# Altium PCB DSV1-002（电池保护板） REV0.2 20230331.PcbDoc (part 1 of 2)
Units mm, origin at the board's own origin, x right, y up, seen from the top; angles counter-clockwise.
Board outline 35.24 x 36.91 mm, 2 copper layers (TOP, BOTTOM), stack 0.264 mm thick; 97 components, 56 nets, 257 pads, 145 vias.
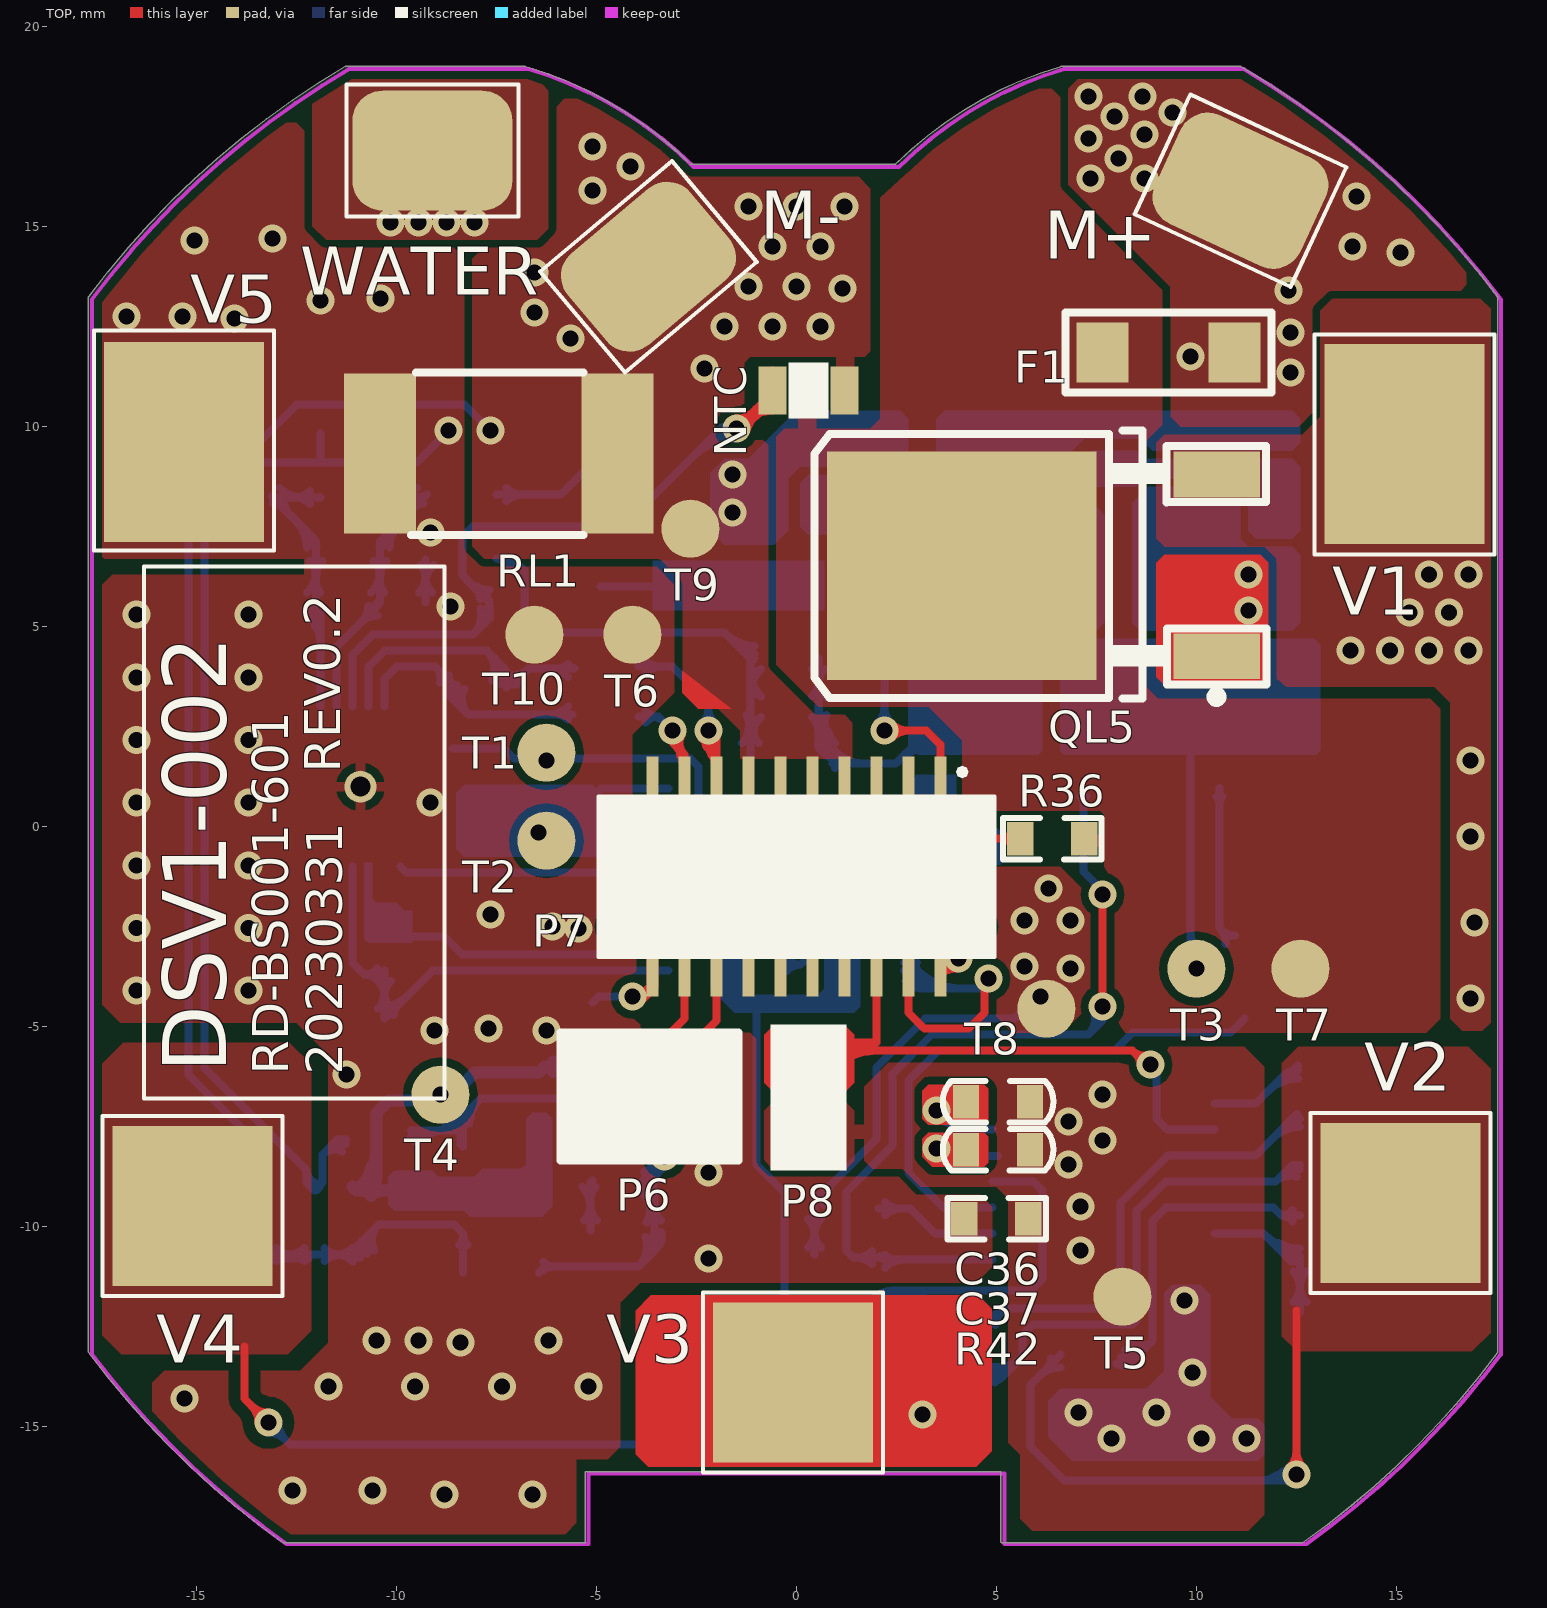
[diagram p0: TOP view]
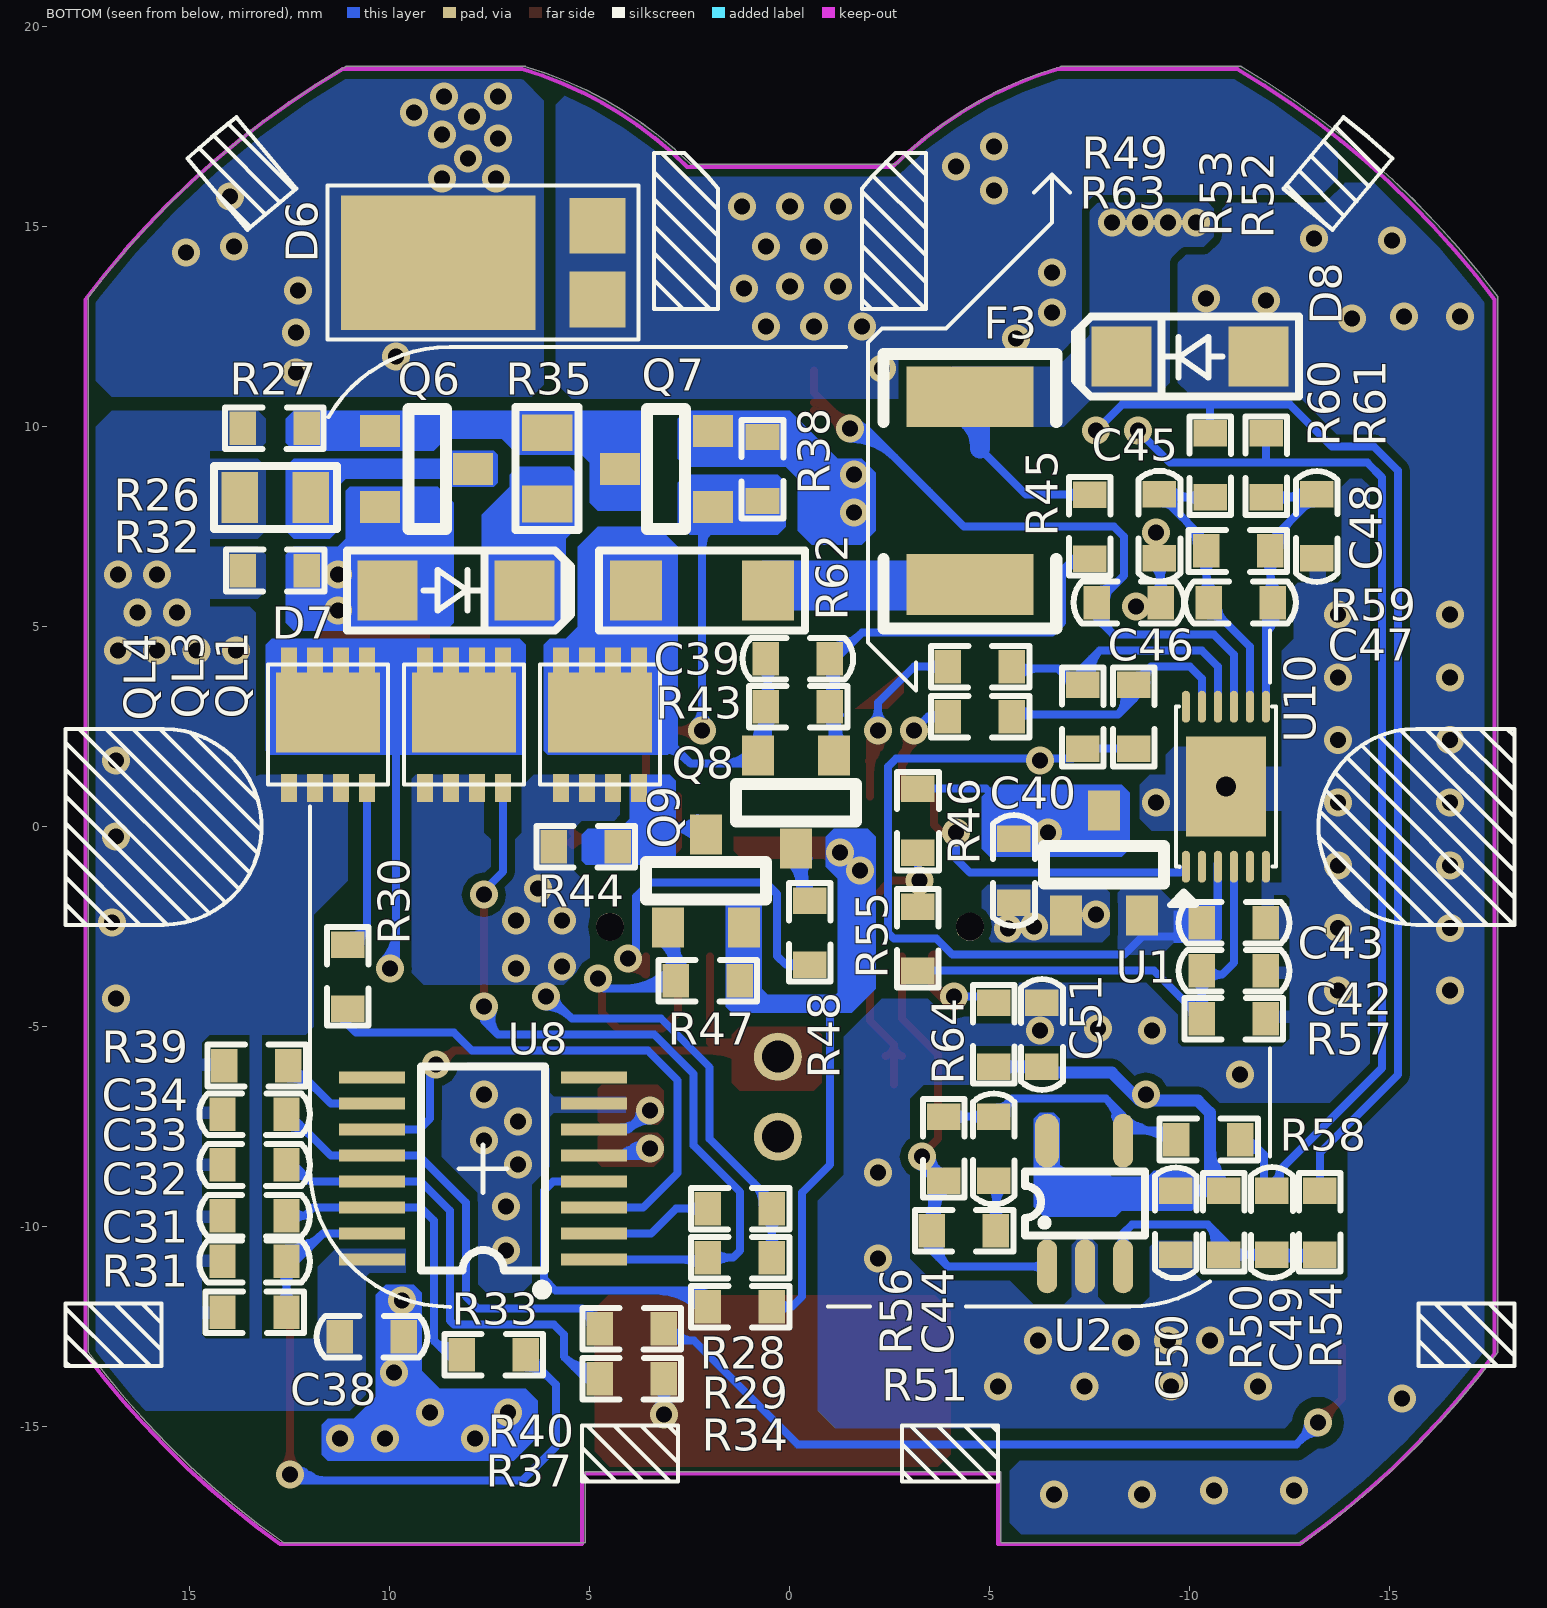
[diagram p1: BOTTOM view, seen from below]

## Layer stack, top to bottom
TOP: signal copper 0.0305
Dielectric: core 0.2032, FR-4, Dk 4.5
BOTTOM: signal copper 0.0305

## Board outline
-2.652,16.567 2.479,16.567 cw(c9.421,9.526) 6.606,19.004 6.613,19.007 11.103,19.007 11.113,19.002 cw(c-0.095,0.032) 17.53,13.254 17.536,13.244 17.536,-13.134 17.536,-13.136 17.533,-13.144 cw(c0.141,-0.186) 12.66,-17.897 12.651,-17.899 5.123,-17.899 5.11,-17.886 5.11,-16.129 -5.274,-16.129 -5.274,-17.886 -5.287,-17.899 -12.824,-17.899 -12.835,-17.897 cw(c-0.056,0.042) -17.697,-13.144 -17.7,-13.133 -17.7,13.244 -17.696,13.253 cw(c-0.133,0.124) -11.283,19.005 -11.276,19.007 -6.777,19.007 -6.771,19.005 cw(c-9.559,9.598)

## Design rules (kind name [scope] priority, off if disabled: settings)
Clearance 0.3 [InNet('V4')] p1: gap=0.3
Clearance [All] p2: gap=0.2
PlaneConnect [All] p1: planeconnectstyle=Relief reliefexpansion=0.508 reliefentries=4 reliefconductorwidth=0.254 reliefairgap=0.2
PolygonConnect [All] p1: connectstyle=Direct reliefconductorwidth=0.254 reliefentries=4 polygonreliefangle="90 Angle" airgapwidth=0.2
RoutingVias [All] p1: holewidth=0.4 width=0.7 viastyle="Through Hole" minholewidth=0.4 minwidth=0.7 maxholewidth=0.4 maxwidth=0.7
SolderMaskExpansion [All] p1: expansion=0.102
Width 0_3 [InNet('+5VSB')] p1: maxlimit=0.3 minlimit=0.3 preferedwidth=0.3
Width [All] p2: maxlimit=0.2 minlimit=0.2 preferedwidth=0.2
27 further rules are at their usual default settings.

## Components (designator, comment, footprint, x,y, rotation, side; value= is the part's Value field where it differs from the comment)
C31 "C_4_C0603_104" 0603C 13.385,-10.868 r0 bottom
C32 "C_4_C0603_104" 0603C 13.385,-9.725 r0 bottom
C33 "C_4_C0603_104" 0603C 13.385,-8.455 r0 bottom
C34 "C_4_C0603_104" 0603C 13.385,-7.185 r0 bottom
C36 "C_4_C0603_104" 0603C 5.039,-6.87 r180 top
C37 "C_4_C0603_104" 0603C 5.039,-8.07 r180 top
C38 "C_4_C0603_225" 0603C 10.45,-12.75 r0 bottom
C39 "C_4_C0603_104" 0603C -0.2,4.2 r180 bottom
C40 "CAP NP_C0603_0.1UF/50V" 0603C -5.6,-1.1 r270 bottom
C42 "C_4_C0603_1UF/50V" 0603C -11.1,-3.6 r0 bottom
C43 "C_4_C0603_1UF/50V" 0603C -11.1,-2.4 r0 bottom
C44 "C_4_C0603_104" 0603C -5.1,-8.05 r90 bottom
C45 "C_4_C0603_104" 0603C -9.237,7.509 r270 bottom
C46 "C_4_C0603_103" 0603C -8.475,5.604 r180 bottom
C47 "C_4_C0603_104" 0603C -11.269,5.604 r180 bottom
C48 "C_4_C0603_104" 0603C -13.174,7.509 r90 bottom
C49 "C_4_C0603_105" 0603C -12.05,-9.9 r270 bottom
C50 "C_4_C0603_104" 0603C -9.65,-9.9 r90 bottom
C51 "C_4_C0603_104" 0603C -6.3,-5.2 r270 bottom
D6 "SB2045" TO-277 6.8,14.1 r90 bottom (schematic designator D7)
D7 "ZHCS1000/SOT_6_SOD123_SS1060FL" SOD-123 8.345,5.904 r180 bottom
D8 "ZHCS1000/SOT_6_SOD123_SS1060FL" SOD-123 -10,11.75 r0 bottom
F1 "NTC_0603_10K/3380K" 1206R 9.3,11.85 r0 top
F3 "FUSE_1210_0.5R" 1812R -4.5,8.4 r90 bottom
M+ "HEADER 1_2_SMD_REC20M30_M+" SMD_REC20M30 11.1,15.9 r65 top
M- "HEADER 1_3_SMD_REC20M30_M-" SMD_REC20M30 -3.7,14 r130 top
NTC "NTC_0603_10K/3380K" 0603r#1 0.3,10.9 r180 top
P6 "Comment" HDR1X2#1 -4.7,-6.7 r0 top
P7 "HEADER 12_1_SGDBM_08_020P_V40_S" SGDBM_08_020P_V40 0,-1.25 r0 top locked
P8 "Comment" HDR1X2#2 2.6,-6.35 r180 top
Q6 "2N3904_1_SOT_23_MMBT2222A" SOT-23-ss#1 9.067,8.944 r270 bottom
Q7 "2N3904_0_SOT_23_MMBT2222A" SOT-23-ss#1 3.098,8.944 r90 bottom
Q8 "2N3906_1_SOT_23_MMBT2907A" SOT-23-ss#1 -0.15,0.6 r0 bottom
Q9 "2N3904_0_SOT_23_MMBT2222A" SOT-23-ss#1 2.1,-1.35 r180 bottom
QL1 "AP30P03DF  DFN8*8" "EDFN 3*3" 4.75,2.55 r180 bottom
QL3 "AP30P03DF  DFN8*8" "EDFN 3*3" 8.15,2.55 r180 bottom (schematic designator QL1)
QL4 "AP30P03DF  DFN8*8" "EDFN 3*3" 11.55,2.55 r180 bottom (schematic designator QL1)
QL5 "MOS-P" TO-252 4.2,6.5 r90 top (schematic designator QL1)
R26 "R_1_R0805_10R" 0805r 12.75,8.309 r0 bottom
R27 "R_1_R0603_5.1K" 0603R 12.877,9.96 r0 bottom
R28 "R_1_R0603_5.1K" 0603R 1.25,-9.55 r180 bottom
R29 "R_1_R0603_4.7M" 0603R 1.25,-10.775 r180 bottom
R30 "R_1_R0603_5.1K" 0603R 11.05,-3.75 r90 bottom
R31 "R_1_R0603_1K" 0603R 13.385,-12.138 r180 bottom
R32 "R_1_R0603_5.1K" 0603R 12.877,6.404 r180 bottom
R33 "R_1_R0603_1K" 0603R 7.4,-13.2 r0 bottom
R34 "R_1_R0603_1K" 0603R 1.25,-12 r180 bottom
R35 "R_1_R0805_10R" 0805r 6.146,9.071 r270 bottom
R36 "R_1_R0603_200K" 0603R 6.4,-0.3 r180 top
R37 "R_1_R0603_1K" 0603R 3.95,-13.8 r0 bottom
R38 "R_1_R0603_5.1K" 0603R 0.685,8.944 r270 bottom
R39 "R_1_R0603_1K" 0603R 13.339,-5.97 r180 bottom
R40 "R_1_R0603_1K" 0603R 3.95,-12.55 r0 bottom
R42 "R_1_R0603_51R" 0603R 5,-9.8 r0 top
R43 "R_1_R0805_10K" 0603r#2 -0.2,3 r180 bottom
R44 "R_1_R0603_5.1K" 0603R 5.1,-0.5 r0 bottom
R45 "R_1_R0603_10K" 0603R -7.5,7.5 r90 bottom
R46 "R_1_R0805_100R" 0603r#2 -3.2,0.15 r270 bottom
R47 "R_1_R0603_5.1K" 0603R 2.05,-3.85 r0 bottom
R48 "R_1_R0603_100K" 0603R -0.5,-2.65 r90 bottom
R49 "R_1_R0603_10K" 0603R -4.75,4 r180 bottom
R50 "R_1_R0603_5.1K" 0603R -10.85,-9.9 r90 bottom
R51 "R_1_R0603_10K" 0603R -4.35,-10.1 r180 bottom
R52 "R_1_R0603_5.1K" 0603R -8.597,2.753 r270 bottom
R53 "R_1_R0603_5.1K" 0603R -7.317,2.753 r270 bottom
R54 "R_1_R0603_5.1K" 0603R -13.25,-9.9 r90 bottom
R55 "R_1_R0603_4.7M" 0603R -3.2,-2.8 r90 bottom
R56 "R_1_R0603_100K" 0603R -3.85,-8.05 r90 bottom
R57 "R_1_R0603_1M" 0603R -11.1,-4.8 r0 bottom
R58 "R_1_R0603_5.1K" 0603R -10.461,-7.82 r180 bottom
R59 "R_1_R0603_100R" 0603R -11.209,6.894 r0 bottom
R60 "R_1_R0603_100R" 0603R -10.507,9.033 r270 bottom
R61 "R_1_R0603_100R" 0603R -11.904,9.033 r270 bottom
R62 "R_1_R1206_100MR 1%" 1206-r 2.2,5.9 r180 bottom
R63 "R_1_R0603_10K" 0603R -4.75,2.75 r180 bottom
R64 "R_1_R0603_100K" 0603R -5.1,-5.2 r90 bottom
RL1 "R_1_R2512_15MR 1%" 2512R -7.443,9.325 r90 top
T1 "" TP -6.25,1.85 r90 top (schematic designator TP1)
T2 "" TP -6.25,-0.35 r90 top (schematic designator TP1)
T3 "" TP 10,-3.55 r90 top (schematic designator TP1)
T4 "" TP -8.9,-6.7 r90 top (schematic designator TP1)
T5 "" TP 8.15,-11.75 r90 top (schematic designator TP1)
T6 "" TP -4.1,4.8 r90 top (schematic designator TP1)
T7 "" TP 12.6,-3.55 r90 top (schematic designator TP1)
T8 "" TP 6.25,-4.55 r90 top (schematic designator TP1)
T9 "" TP -2.65,7.45 r90 top (schematic designator TP1)
T10 "" TP -6.55,4.8 r90 top (schematic designator TP1)
U1 "P DGS_2_SOT_23_NCE3400" SOT-23-ss#2 -7.85,-0.95 r180 bottom
U2 "Comment" SOT-23-5 -7.38,-9.419 r180 bottom
U8 "LM3875/TO220_14_TSSOP16_P065_05" TSSOP16 7.67,-8.55 r0 bottom
U10 "LM3875/TO220_15_DFN12_4X3_0R5_C" DFN12_4X3_0R5 -10.9,1 r270 bottom
V1 "HEADER 1_2_S_45X45_B+" S_45X45#1 15.203,9.574 r0 top locked
V2 "HEADER 1_2_S_45X45_11.1V" S_45X45#2 15.1,-9.406 r0 top locked
V3 "HEADER 1_2_S_45X45_7.4V" S_45X45#2 -0.087,-13.896 r0 top locked
V4 "HEADER 1_2_S_45X45_3.7V" S_45X45#2 -15.1,-9.476 r0 top locked
V5 "HEADER 1_2_S_45X45_B-" S_45X45#1 -15.317,9.614 r0 top
WATER "HEADER 1_3_SMD_REC20M30_WATER" SMD_REC20M30 -9.1,16.9 r90 top

## Footprints (in the part's own frame and the unit in brackets; to place one, negate y for a bottom-side part, rotate by r counter-clockwise, add the part's x,y. Pads: shape width x height; smd on the part's side, far side on the other; paste and mask are expansions set on the pad)
0603C [mil]
  rect 26x33 smd mask+0: 1(31.5,0) 2(-31.5,0)
  silkscreen extent -55,-20 54,21
0603r#1 [mm]
  rect 0.7x1.2 smd mask+0: 1(0.9,0) 2(-0.9,0)
0603r#2 [mm]
  rect 0.66x0.838 smd mask+0: 1(0.8,0) 2(-0.8,0)
  silkscreen extent -1.22,-0.52 1.24,0.52
0603R [mil]
  rect 26x33 smd mask+0: 1(31.5,0) 2(-31.5,0)
  silkscreen extent -48,-20 49,21
0805r [mil]
  rect 36x50 smd mask+0: 1(39.5,3.17) 2(-30.5,3.17)
  silkscreen extent -56,-28 65,34
1206-r [mm]
  rect 1.3x1.5 smd: 1(1.65,0) 2(-1.65,0)
  silkscreen extent -2.57,-1 2.57,1
1206R [mm]
  rect 1.3x1.5 smd: 1(1.65,0) 2(-1.65,0)
  silkscreen extent -2.57,-1 2.57,1
1812R [mil]
  rect 60x125 smd: 1(-92.5,0) 2(92.5,0)
  silkscreen extent -135,-85 135,85
2512R [mm]
  rect 4x1.8 smd: 1(0,2.965) 2(0,-2.965)
  silkscreen extent -2.03,-2.12 2.03,2.2
DFN12_4X3_0R5 [mm] "DFN12_4X3_0R5"
  oval 0.8x0.2 smd: 1(2,-1) 2(2,-0.6) 3(2,-0.2) 4(2,0.2) 5(2,0.6) 6(2,1) 7(-2,1) 8(-2,0.6) 9(-2,0.2) 10(-2,-0.2) 11(-2,-0.6) 12(-2,-1)
  rect 2.5x2 smd: 13(0,0)
  silkscreen extent -2,-1.4 2.96,1.25
"EDFN 3*3" [mm]
  rect 0.4x0.7 smd: D(-0.975,1.576) D(-0.325,1.576) D(0.325,1.576) D(0.975,1.576) G(0.975,-1.576) S(-0.975,-1.576) S(-0.325,-1.576) S(0.325,-1.576)
  rect 2.6x2 smd: D(0,0.305)
  silkscreen extent -1.5,-1.5 1.5,1.5
HDR1X2#1 [mm] "Connector; Header; 2 Position"
  oval 1.5x2.2 smd: 1(-0.1,0) 2(2.1,0)
  silkscreen extent -1.2,-1.65 3.25,1.55
HDR1X2#2 [mm] "Connector; Header; 2 Position"
  oval 1.7x1.3 / inner round 1.2 / far side round 1.2 hole 0.8: 1(2.3,1.4) 2(2.3,-0.6)
S_45X45#1 [mm] "S_45X45"
  rect 4x5 smd: 1(0,0)
  silkscreen extent -2.25,-2.77 2.25,2.73
S_45X45#2 [mm] "S_45X45"
  rect 4x4 smd: 1(0,0)
  silkscreen extent -2.25,-2.25 2.25,2.25
SGDBM_08_020P_V40 [mm] "SGDBM_08_020P_V40"
  rect 0.3x2 smd: 1(3.6,2) 2(2.8,2) 3(2,2) 4(1.2,2) 5(0.4,2) 6(-0.4,2) 7(-1.2,2) 8(-2,2) 9(-2.8,2) 10(-3.6,2) 11(3.6,-2) 12(2.8,-2) 13(2,-2) 14(1.2,-2) 15(0.4,-2) 16(-0.4,-2) 17(-1.2,-2) 18(-2,-2) 19(-2.8,-2) 20(-3.6,-2)
  round 0.7 / inner round 1.524 / far side round 0.7 hole 0.7: " "(-4.5,-1.25) " "(4.499,-1.251)
  silkscreen extent -4.95,-2 4.95,2.77
SMD_REC20M30 [mm] "SMD_REC20M30"
  rrect50% 3x4 smd: 1(0,0)
  silkscreen extent -1.65,-2.15 1.65,2.15
SOD-123 [mm]
  rect 1.5x1.5 smd: 1(-1.715,0) 2(1.715,0)
  silkscreen extent -2.73,-1 2.89,1
SOT-23-5 [mm]
  oval 0.5x1.35 smd: 1(-0.95,-1.57) 2(0,-1.57) 3(0.95,-1.57) 4(0.95,1.57)
  oval 0.6x1.35 smd: 5(-0.95,1.57)
  silkscreen extent -1.5,-0.8 1.5,0.8
SOT-23-ss#1 [mm]
  rect 0.8x1 smd: 1(-0.95,-1.175) 2(0.95,-1.175) 3(0,1.15)
  silkscreen extent -1.5,-0.47 1.5,0.47
SOT-23-ss#2 [mm]
  rect 0.8x1 smd: 1(-0.95,-1.275) 2(0.95,-1.275) 3(0,1.35)
  silkscreen extent -1.5,-0.47 1.5,0.47
TO-252 [mil]
  rect 225x265 smd: D(0.79,2.76)
  rect 45x85 smd: G(-88.21,-248.24) S(90.79,-248.24)
  silkscreen extent -133,-297 134,148
TO-277 [mm]
  rect 1.39x1.4 smd: 1(-0.92,-1.991) 1(0.92,-1.991)
  rect 3.36x4.86 smd: 2(0,1.991)
  silkscreen extent -1.92,-3.01 1.93,4.77
TP [mm]
  round 1.45 smd mask+0: 1(0,0)
TSSOP16 [mm] "TSSOP16_P065_050X044"
  rect 1.65x0.3 smd: 1(-2.775,2.275) 2(-2.775,1.625) 3(-2.775,0.975) 4(-2.775,0.325) 5(-2.775,-0.325) 6(-2.775,-0.975) 7(-2.775,-1.625) 8(-2.775,-2.275) 9(2.775,-2.275) 10(2.775,-1.625) 11(2.775,-0.975) 12(2.775,-0.325) 13(2.775,0.325) 14(2.775,0.975) 15(2.775,1.625) 16(2.775,2.275)
  silkscreen extent -1.6,-2.55 1.55,3.15

## Part data
D6: library part "Diode 1N4448", "High Conductance Fast Diode"
QL1 QL3 QL4: library part 30H10K
T1 T2 T3 T4 T5 T6 T7 T8 T9 T10: library part TP

## Free pads (board coordinates)
  round 0.8 hole 0.5: 0(-10.9,1)
  round 1.524 all layers, no hole: 0(26.981,-11.637) 0(26.99,120.879) 0(137.644,-11.637) 0(137.653,120.879)

## Via types
v1: diameter 0.7, hole 0.4, TOP to BOTTOM, tented both sides, 145 vias

## Nets (pads, with @x,y where several pads share a name; then routed paths per layer and width w, separated by ;. In a path a pad name is that pad's centre, name@x,y a point inside that pad or via, vN(x,y) a via of type N, cw(c..) or ccw(c..) an arc to the next point about the centre after c; other vN are vias at no path point)
+3.3V: C43.1 R52.1 R53.1 T1.1 U1.2 U10.3 | length 22.4
  BOTTOM w0.2: U10.3@-10.7,-1 -10.7,-2 ; C43.1@-10.3,-2.4 -10.7,-2 ; R52.1@-8.597,1.953 R53.1@-7.317,1.953 -7.064,1.7 -2.65,1.7 -2.45,1.5 -2.45,-2.65 -2.6,-2.8 -3.666,-2.8 -4.066,-3.2 -8.35,-3.2 -8.8,-2.75 -9.597,-2.75 ; -10.7,-2 ccw(c-10.454,-1.754) -10.361,-2.089 cw(c-10.454,-1.754) -10.7,-2 ; -9.597,-2.75 cw(c-9.597,-1.786) -10.279,-2.468 ccw(c-9.597,-1.786) -9.597,-2.75 ; C43.1@-10.63,-2.07 cw(c-10.871,-2.311) -10.53,-2.311 ccw(c-10.871,-2.311) C43.1@-10.63,-2.07
  other v1: -6.25,1.65
+5VSB: C50.1 C51.1 R50.1 R64.2 T4.1 U2.5 | length 25.8
  BOTTOM w0.3: R50.1@-11.1,-9 -11,-9.1 -6.7,-9.1 -6.43,-8.83 U2.5@-6.43,-7.999 ; R50.1@-10.725,-8.925 -10.5,-8.7 ; R50.1@-10.603,-9.014 cw(c-10.109,-8.746) -10.595,-8.465 ; C50.1@-9.83,-8.97 C50.1@-9.761,-8.97 ; R64.2@-5.1,-6 C51.1@-6.3,-6 -6.45,-6.15 -8.05,-6.15 -8.75,-6.85 -10.2,-6.85 -10.5,-7.15 -10.5,-8.7 ; -10.5,-8.7 ccw(c-10.252,-8.949) -10.588,-9.049 cw(c-10.252,-8.949) -10.5,-8.7 ; -10.326,-9.1 cw(c-10.326,-8.665) -10.634,-8.973 ccw(c-10.326,-8.665) -10.326,-9.1 ; -10.326,-9.1 ccw(c-10.326,-9.535) -10.634,-9.227 cw(c-10.326,-9.535) -10.326,-9.1 ; -10.174,-9.1 cw(c-10.174,-9.535) -9.866,-9.227 ccw(c-10.174,-9.535) -10.174,-9.1 ; -10.174,-9.1 ccw(c-10.174,-8.665) -9.866,-8.973 cw(c-10.174,-8.665) -10.174,-9.1 ; -9.126,-9.1 cw(c-9.126,-8.665) -9.434,-8.973 ccw(c-9.126,-8.665) -9.126,-9.1 ; -9.126,-9.1 ccw(c-9.126,-9.535) -9.434,-9.227 cw(c-9.126,-9.535) -9.126,-9.1 ; -6.43,-8.586 cw(c-6.068,-8.586) -6.324,-8.33 ccw(c-6.068,-8.586) -6.43,-8.586 ; -6.43,-8.586 ccw(c-6.793,-8.586) -6.536,-8.33 cw(c-6.793,-8.586) -6.43,-8.586 ; -5.776,-6 cw(c-5.776,-5.565) -6.084,-5.873 ccw(c-5.776,-5.565) -5.776,-6 ; -5.776,-6 ccw(c-5.776,-6.435) -6.084,-6.127 cw(c-5.776,-6.435) -5.776,-6 ; -5.624,-6 cw(c-5.624,-6.435) -5.316,-6.127 ccw(c-5.624,-6.435) -5.624,-6 ; -5.624,-6 ccw(c-5.624,-5.565) -5.316,-5.873 cw(c-5.624,-5.565) -5.624,-6 ; R50.1@-10.889,-8.973 ccw(c-11.826,-8.035) -10.5,-8.035 cw(c-11.826,-8.035) R50.1@-10.889,-8.973 ; R50.1@-10.676,-9.185 ccw(c-11.102,-8.759) -10.5,-8.759 cw(c-11.102,-8.759) R50.1@-10.676,-9.185
  other v1: -8.9,-6.7
+5VSB_: P7.20 R64.1 | length 2.3
  TOP w0.3: v1@-3.925,-4.325 -3.6,-4 P7.20@-3.6,-3.25
  BOTTOM w0.2: R64.1@-5.1,-4.4 -4.95,-4.25 v1(-4.1,-4.25)
B+: C31.1 C32.1 C33.1 C34.1 C38.1 QL4.S QL5.S R26.1 R27.1 R31.2 R32.2 R39.2 U8.16 V1.1
  other v1: 16.85,-4.3 16.95,-2.4 16.85,-0.25 16.85,1.65 13.85,4.4 14.833,4.4 15.817,4.4 16.8,4.4 15.325,5.35 16.308,5.35 15.817,6.3 16.8,6.3
B-: C40.1 C42.2 C43.2 C45.1 C46.1 C48.2 C49.2 C50.2 C51.2 D8.1 P6.1 pad.0@-10.9,1 R42.2 R57.2 R58.1 R61.2 RL1.1 T6.1 T10.1 U1.1 U2.2 U10.6 U10.13 V5.1 | length 36.1
  BOTTOM w0.2: -11.904,9.104 -11.9,9.1 -9.5,9.1 v1(-8.7,9.9) ; R61.2@-11.904,9.833 -11.904,9.1 -14.434,9.1 -14.8,8.734 -14.8,-6.034 -12.25,-8.584 ; R58.1@-11.261,-7.82 -11.47,-7.82 -11.85,-8.2 ; C46.1@-9.275,5.604 C45.1@-9.275,6.5 ; C45.1@-9.275,6.625 C45.1@-9.275,6.5 ; C45.1@-9.275,6.675 C45.1@-9.275,6.5 ; -12.25,-8.584 ccw(c-11.92,-8.584) -12.049,-8.888 cw(c-11.92,-8.584) -12.25,-8.584 ; -12.25,-8.584 -12.25,-8.9 C49.2@-12.05,-9.1 -11.85,-8.9 -11.85,-8.2 ; -11.85,-8.2 cw(c-11.546,-8.504) -11.361,-8.116 ccw(c-11.546,-8.504) -11.85,-8.2 ; -9.275,6.249 cw(c-9.831,6.249) -9.438,5.856 ccw(c-9.831,6.249) -9.275,6.249 ; -9.275,6.249 ccw(c-8.719,6.249) -9.112,5.856 cw(c-8.719,6.249) -9.275,6.249 ; C49.2@-11.982,-9.079 ccw(c-12.302,-8.759) -11.85,-8.759 cw(c-12.302,-8.759) C49.2@-11.982,-9.079 ; -11.65,-8 cw(c-11.417,-8.234) -11.274,-7.936 ccw(c-11.417,-8.234) -11.65,-8 ; C45.1@-9.4,6.546 cw(c-9.701,6.245) -9.275,6.245 ccw(c-9.701,6.245) C45.1@-9.4,6.546 ; -9.275,6.062 cw(c-8.59,6.062) -9.074,6.546 ccw(c-8.59,6.062) -9.275,6.062
  other v1: -8.8,-16.7 -6.6,-16.7 -12.6,-16.6 -10.6,-16.6 -15.3,-14.3 -11.7,-14 -9.533,-14 -7.367,-14 -5.2,-14 -8.4,-12.9 -10.5,-12.85 -9.45,-12.85 -6.2,-12.85 -2.2,-10.8 -2.2,-8.65 -11.25,-6.2 -9.05,-5.1 -6.25,-5.1 -7.7,-5.05 -16.5,-4.1 -13.7,-4.1 -5.45,-2.55 -16.5,-2.533 -13.7,-2.533 -6.1,-2.5 -7.65,-2.2 -16.5,-0.967 -13.7,-0.967 -16.5,0.6 -13.7,0.6 -9.15,0.6 -16.5,2.167 -13.7,2.167 -16.5,3.733 -13.7,3.733 -16.5,5.3 -13.7,5.3 -8.65,5.5 -9.15,7.35 -14.05,12.7 -16.75,12.75 -15.35,12.75 -11.9,13.15 -10.4,13.2 -15.05,14.65 -13.1,14.7
BAT+: QL3.D QL4.D T3.1 | length 7.6
  BOTTOM w0.2: v1@9.85,-3.6 9.85,2.6 ; 9.85,-3.067 ccw(c10.483,-3.067) v1@10.035,-3.515 ; 9.85,-2.584 ccw(c10.966,-2.584) v1@10.177,-3.373
  other v1: 10,-3.55
BAT_GND: D6.1 M-.1 NTC.2 P7.4 P7.5 P7.6 P7.7 Q7.2 Q9.2 R34.1 R38.2 R47.2 R54.1 R60.2 RL1.2 T9.1 | length 59.5
  BOTTOM w0.2: R54.1@-13.25,-9.1 -13.25,-8.15 -15.2,-6.2 -15.2,8.9 -14.6,9.5 -13.55,9.5 -12.5,10.55 -10.45,10.55 ; R60.2@-10.507,9.833 -10.507,10.493 -10.45,10.55 ; v1(-7.65,9.9) -8.3,10.55 -10.45,10.55 ; -0.8,-4.4 -1,-4.6 -1,-8.45 -0.3,-9.15 -0.3,-11.75 -0.05,-12 ; -0.6,8.3 -0.6,9.1 ; -0.018,9.617 ccw(c-0.12,10.265) R38.2@0.41,9.879 ; 0.029,9.429 ccw(c-0.101,10.251) R38.2@0.572,9.762 ; 0.121,9.639 cw(c0.193,9.189) R38.2@0.461,9.558 ; R34.1@0.275,-12.15 ccw(c-0.05,-12.428) -0.05,-12 ; R34.1@0.275,-11.85 cw(c-0.05,-11.572) -0.05,-12 ; R34.1@0.45,-12 -0.05,-12 ; R38.2@0.799,9.761 ccw(c0.999,9.895) 1.119,9.686 ; R38.2@0.889,9.943 ccw(c1.063,10.245) 1.153,9.909 ; R38.2@0.965,9.872 ccw(c1.177,10.014) 1.304,9.793 ; R38.2@0.973,9.629 cw(c1.634,9.247) Q7.2@1.437,9.985 ; R47.2@1.112,-4.123 cw(c0.903,-4.4) 1.25,-4.4 ; R47.2@1.25,-3.65 1.25,-4.4 ; R47.2@1.388,-4.123 ccw(c1.597,-4.4) 1.25,-4.4 ; Q7.2@1.923,9.894 0.194,9.894 ; -0.6,9.1 cw(c0.421,8.079) 0.572,9.515 ccw(c0.421,8.079) -0.6,9.1 ; -0.6,9.1 0.194,9.894 ; 0.194,9.894 cw(c0.194,9.721) 0.366,9.731 ccw(c0.194,9.721) 0.194,9.894 ; R38.2@1.099,9.894 cw(c1.099,9.17) 1.611,9.682 ccw(c1.099,9.17) R38.2@1.099,9.894 ; R38.2@1.099,9.894 ccw(c1.099,10.618) 1.611,10.106 cw(c1.099,10.618) R38.2@1.099,9.894 ; 1.215,9.766 cw(c1.33,9.338) Q7.2@1.624,9.67 ; 1.215,9.766 ccw(c1.071,10.304) Q7.2@1.56,10.038 ; 1.215,9.766 cw(c1.33,9.338) Q7.2@1.624,9.67 ; 1.215,9.766 ccw(c1.071,10.304) Q7.2@1.56,10.038 ; 1.215,9.766 cw(c1.33,9.338) Q7.2@1.624,9.67 ; 1.215,9.766 ccw(c1.071,10.304) Q7.2@1.56,10.038 ; -0.303,9.397 cw(c0.477,8.616) 0.593,9.714 ccw(c0.477,8.616) -0.303,9.397 ; -0.007,9.693 cw(c0.534,9.152) 0.614,9.913 ccw(c0.534,9.152) -0.007,9.693 ; R38.2@0.795,9.723 cw(c1.209,9.309) 1.209,9.894 ccw(c1.209,9.309) R38.2@0.795,9.723 ; R38.2@0.937,9.581 cw(c1.692,8.826) 1.692,9.894 ccw(c1.692,8.826) R38.2@0.937,9.581
  other v1: -1.75,-1.1 -1.25,-0.65 -1.6,7.85 -1.6,8.8 -2.3,11.45 -5.65,12.2 -1.8,12.5 -0.6,12.5 0.6,12.5 -6.55,12.85 1.15,13.45 -1.2,13.5 0,13.5 -6.55,13.85 -0.6,14.5 0.6,14.5 -1.2,15.5 0,15.5 1.2,15.5 -5.1,15.9 -4.15,16.5 -5.1,17
CH+: P7.14 P7.15 P7.16 P7.17 QL1.S QL3.S R28.1 R29.1 R44.1 R46.1 R55.1 T8.1 | length 16.2
  TOP w0.2: v1(-3.244,-1.344) -2.53,-1.344 -2.124,-1.75 -1.376,-1.75
  BOTTOM w0.2: v1@-3.2,-1.344 R46.1@-3.2,-0.65 ; R29.1@0.287,-10.523 ccw(c-0.106,-10.13) 0.45,-10.13 ccw(c1.006,-10.13) R29.1@0.613,-10.523 ; R28.1@0.287,-9.802 cw(c-0.106,-10.195) 0.45,-10.195 cw(c1.006,-10.195) R28.1@0.613,-9.802 ; R29.1@0.45,-10.7 0.45,-9.361 2.004,-7.806 2.004,-6.014 3.219,-4.8 5.45,-4.8 v1@5.9,-4.35 ; R28.1@0.45,-9.231 ccw(c0.45,-8.917) R28.1@0.672,-9.139 ; R28.1@0.68,-9.461 cw(c1.478,-9.461) 0.914,-8.897 ; 5.503,-4.747 cw(c6.1,-5.345) v1@6.1,-4.5 ; 5.744,-4.506 ccw(c5.488,-4.25) v1@5.85,-4.25
  other v1: 6.1,-4.25 6.85,-3.55 5.7,-3.5 5.7,-2.35 6.85,-2.35 6.3,-1.55
CSN: C45.2 C47.2 R59.1 R60.1 U10.8 | length 22.2
  BOTTOM w0.2: U10.8@-11.5,3 -11.5,4.5 -10.409,5.591 R59.1@-10.409,6.894 -10.409,7.137 C45.2@-9.237,8.309 -9.313,8.233 R60.1@-10.507,8.233 ; -10.896,5.105 ccw(c-11.238,5.522) C47.2@-10.699,5.517 ; C47.2@-10.784,5.197 cw(c-10.531,4.889) C47.2@-10.492,5.286 ; C47.2@-10.599,5.474 C47.2@-10.469,5.604 ; R59.1@-10.421,7.011 ccw(c-10.663,7.585) -10.061,7.424 ; -9.663,7.912 cw(c-9.146,7.773) C45.2@-9.316,8.28 ; -10.409,6.249 cw(c-9.853,6.249) -10.246,6.642 ccw(c-9.853,6.249) -10.409,6.249 ; -10.409,6.249 ccw(c-10.965,6.249) -10.572,6.642 cw(c-10.965,6.249) -10.409,6.249 ; -9.862,8.233 cw(c-9.862,8.789) -10.255,8.396 ccw(c-9.862,8.789) -9.862,8.233 ; -9.862,8.233 ccw(c-9.862,7.677) -10.255,8.07 cw(c-9.862,7.677) -9.862,8.233 ; -10.889,5.111 cw(c-10.469,4.691) -10.469,5.285 ccw(c-10.469,4.691) -10.889,5.111 ; -10.851,5.149 ccw(c-11.217,5.515) -10.699,5.515 cw(c-11.217,5.515) -10.851,5.149 ; C47.2@-10.632,5.856 ccw(c-11.17,6.394) -10.409,6.394 cw(c-11.17,6.394) C47.2@-10.632,5.856 ; -10.409,6.104 ccw(c-10.058,6.104) -10.306,5.856 cw(c-10.058,6.104) -10.409,6.104 ; R59.1@-10.379,6.983 cw(c-9.934,6.983) -10.248,7.298 ccw(c-9.934,6.983) R59.1@-10.379,6.983 ; R59.1@-10.179,6.983 cw(c-9.251,6.983) -9.907,7.639 ccw(c-9.251,6.983) R59.1@-10.179,6.983 ; -10.065,8.233 ccw(c-10.065,9.048) -9.489,8.472 cw(c-10.065,9.048) -10.065,8.233 ; -9.782,7.764 ccw(c-10.326,8.309) -9.556,8.309 cw(c-10.326,8.309) -9.782,7.764 ; -9.698,8.233 cw(c-9.698,7.937) -9.489,8.146 ccw(c-9.698,7.937) -9.698,8.233 ; C45.2@-9.567,7.979 cw(c-9.326,7.738) -9.326,8.079 ccw(c-9.326,7.738) C45.2@-9.567,7.979
CSP: C47.1 C48.1 R59.2 R61.1 U10.7 | length 22.6
  BOTTOM w0.2: C48.1@-13.095,8.28 cw(c-13.265,7.773) -12.748,7.912 ; -12.359,7.429 ccw(c-11.747,7.593) R59.2@-11.997,7.011 ; -12.117,5.154 cw(c-11.891,5.284) C47.1@-12.051,5.491 ; C47.1@-12.069,5.604 -11.9,5.435 U10.7@-11.9,3 ; C47.1@-12.009,5.604 R59.2@-12.009,6.894 -12.009,7.144 -13.098,8.233 R61.1@-11.904,8.233 ; -12.003,4.956 cw(c-11.75,5.102) C47.1@-11.928,5.333 ; -12.549,8.233 cw(c-12.549,7.677) -12.156,8.07 ccw(c-12.549,7.677) -12.549,8.233 ; -12.549,8.233 ccw(c-12.549,8.789) -12.156,8.396 cw(c-12.549,8.789) -12.549,8.233 ; -12.009,6.249 cw(c-11.453,6.249) -11.846,6.642 ccw(c-11.453,6.249) -12.009,6.249 ; -12.009,6.249 ccw(c-12.565,6.249) -12.172,6.642 cw(c-12.565,6.249) -12.009,6.249 ; C48.1@-13.085,8.079 cw(c-13.085,7.738) -12.844,7.979 ccw(c-13.085,7.738) C48.1@-13.085,8.079 ; C48.1@-12.922,8.146 cw(c-12.713,7.937) -12.713,8.233 ccw(c-12.713,7.937) C48.1@-12.922,8.146 ; C48.1@-12.922,8.472 ccw(c-12.346,9.048) -12.346,8.233 cw(c-12.346,9.048) C48.1@-12.922,8.472 ; C48.1@-12.855,8.309 ccw(c-12.085,8.309) -12.629,7.764 cw(c-12.085,8.309) C48.1@-12.855,8.309 ; -12.516,7.651 cw(c-13.184,6.983) -12.239,6.983 ccw(c-13.184,6.983) -12.516,7.651 ; C47.1@-12.232,5.352 cw(c-13.033,4.551) -11.9,4.551 ccw(c-13.033,4.551) C47.1@-12.232,5.352 ; C47.1@-12.232,5.856 ccw(c-12.77,6.394) -12.009,6.394 cw(c-12.77,6.394) C47.1@-12.232,5.856 ; R59.2@-12.174,7.309 cw(c-12.501,6.983) -12.039,6.983 ccw(c-12.501,6.983) R59.2@-12.174,7.309 ; C47.1@-12.09,5.494 cw(c-12.55,5.034) -11.9,5.034 ccw(c-12.55,5.034) C47.1@-12.09,5.494 ; -12.009,6.104 ccw(c-11.658,6.104) -11.906,5.856 cw(c-11.658,6.104) -12.009,6.104
CTL: P7.13 P8.2 U8.11 | length 19.3
  TOP w0.2: P8.2@0.45,-5.6 8.4,-5.6 ; P8.2@0.521,-5.821 cw(c1.054,-6.354) P8.2@1.054,-5.6 ; P8.2@0.662,-5.962 cw(c1.536,-6.836) 1.536,-5.6 ; P8.2@0.804,-6.104 cw(c2.019,-7.319) 2.019,-5.6 ; P8.2@0.804,-5.396 ccw(c1.295,-4.905) 1.295,-5.6 ; 1.15,-5.4 2,-5.4 P7.13@2,-3.25 ; v1@8.8,-6 8.4,-5.6 ; 8.4,-5.6 ccw(c8.689,-5.311) 8.789,-5.708 cw(c8.689,-5.311) 8.4,-5.6 ; 8.494,-5.694 cw(c8.238,-5.95) 8.6,-5.95 ccw(c8.238,-5.95) 8.494,-5.694
  BOTTOM w0.2: v1@8.8,-6 9,-6.2 9,-7.3 9.275,-7.575 U8.11@10.445,-7.575
  other v1: 8.85,-5.95
"EN WATER": P7.12 Q9.1 R47.1 | length 19.5
  TOP w0.2: P7.12@2.8,-3.25 2.8,-4.65 3.2,-5.05 4.3,-5.05 4.7,-4.65 v1@4.7,-3.85
  BOTTOM w0.2: R47.1@2.687,-3.598 ccw(c2.294,-3.205) 2.85,-3.205 ccw(c3.406,-3.205) R47.1@3.013,-3.598 ; 2.687,-3.398 ccw(c2.294,-3.005) 2.85,-3.005 ccw(c3.406,-3.005) 3.013,-3.398 ; R47.1@2.73,-3.859 ccw(c3.191,-3.398) 3.191,-4.05 cw(c3.191,-3.598) R47.1@2.871,-3.918 ; R47.1@2.735,-3.562 ccw(c2.514,-3.179) 2.941,-3.293 ; Q9.1@2.79,-2.775 cw(c2.443,-2.975) 2.83,-3.079 ; Q9.1@2.847,-3.016 cw(c3.303,-3.138) Q9.1@3.094,-2.715 ; R47.1@2.85,-3.669 cw(c3.89,-3.669) Q9.1@3.238,-2.859 ; R47.1@2.85,-3.632 cw(c4.257,-3.632) Q9.1@3.262,-2.637 ; 2.85,-3.252 cw(c3.554,-3.252) Q9.1@3.113,-2.703 ; 2.85,-3.149 cw(c3.774,-3.149) Q9.1@3.121,-2.496 ; R47.1@2.871,-3.718 ccw(c3.674,-2.915) 3.674,-4.05 cw(c3.674,-3.115) R47.1@3.013,-3.776 ; Q9.1@2.883,-2.874 cw(c2.758,-3.061) 2.953,-3.173 ; R47.1@2.911,-3.961 cw(c3.004,-4.296) 3.25,-4.05 ; 2.982,-3.138 ccw(c3.629,-3.311) R47.1@3.049,-3.646 ; R47.1@3.013,-3.576 ccw(c4.157,-2.432) 4.157,-4.05 ; Q9.1@3.05,-2.325 2.85,-2.525 2.85,-3.65 3.25,-4.05 ; R47.1@3.077,-3.903 ccw(c3.25,-3.875) 3.25,-4.05 ; R47.1@3.08,-3.739 ccw(c3.421,-3.739) R47.1@3.18,-3.98 ; v1@4.65,-4.05 3.25,-4.05
  other v1: 4.8,-3.8
"FB MOTO": P7.2 R36.1 | length 6
  TOP w0.2: P7.2@2.8,0.75 2.8,-0.5 3,-0.7 4.3,-0.7 4.7,-0.3 5.4,-0.3 R36.1@5.5,-0.4 ; 5.044,-0.3 cw(c5.044,-0.856) 5.437,-0.463 ccw(c5.044,-0.856) 5.044,-0.3 ; 5.044,-0.3 ccw(c5.044,0.256) 5.437,-0.137 cw(c5.044,0.256) 5.044,-0.3
"FB SENS": P7.19 R51.2 R56.2 U2.1 | length 36.7
  TOP w0.2: v1(-3.3,-8.25) -3.3,-8.2 -3.7,-7.8 -3.7,-5.7 -2.8,-4.8 P7.19@-2.8,-3.25
  BOTTOM w0.2: U2.1@-6.43,-11.139 -6.292,-11 -3.95,-11 ; R56.2@-3.812,-8.626 ccw(c-3.89,-8.286) -3.588,-8.46 ccw(c-3.384,-8.577) R56.2@-3.575,-8.715 ; -3.788,-9.247 cw(c-3.518,-9.091) R56.2@-3.74,-8.871 ; R56.2@-3.789,-9.079 cw(c-3.821,-9.348) -3.585,-9.213 cw(c-3.403,-9.107) R56.2@-3.574,-8.984 ; R56.2@-3.771,-8.821 ccw(c-3.941,-8.314) v1@-3.424,-8.453 ; R51.2@-3.749,-9.896 ccw(c-4.304,-9.576) -3.685,-9.41 ; R56.2@-3.715,-8.588 cw(c-3.456,-8.847) v1@-3.363,-8.492 ; R56.2@-3.709,-8.626 ccw(c-3.633,-8.298) v1@-3.395,-8.536 ; R56.2@-3.672,-8.544 ccw(c-3.966,-8.25) v1@-3.55,-8.25 ; R56.2@-3.665,-8.679 cw(c-3.144,-8.819) v1@-3.287,-8.298 ; -3.658,-9.474 cw(c-3.326,-9.282) R56.2@-3.598,-9.012 ; -3.654,-9.526 ccw(c-3.199,-9.404) R51.2@-3.435,-9.812 ; R56.2@-3.646,-8.681 ccw(c-3.781,-8.447) v1@-3.531,-8.345 ; R56.2@-3.597,-8.688 cw(c-3.505,-8.597) -3.597,-8.506 ; v1@-3.534,-8.337 cw(c-3.931,-8.484) -3.565,-8.696 cw(c-3.216,-8.897) v1@-3.268,-8.498 ; R56.2@-3.533,-8.821 cw(c-3.194,-8.778) v1@-3.365,-8.482 ; v1@-3.509,-8.387 cw(c-3.767,-8.556) R56.2@-3.5,-8.71 ; R56.2@-3.49,-8.607 ccw(c-3.586,-8.51) v1@-3.485,-8.418 ; R56.2@-3.483,-8.682 cw(c-3.13,-8.886) v1@-3.235,-8.491 ; v1@-3.405,-8.546 ccw(c-3.101,-8.85) R56.2@-3.531,-8.85 ; v1(-3.3,-8.25) -3.3,-8.3 R56.2@-3.85,-8.85 -3.55,-9.15 R51.2@-3.55,-10.1 -3.55,-10.6 ; -3.95,-11 ccw(c-4.469,-10.481) -3.769,-10.259 cw(c-4.469,-10.481) -3.95,-11 ; -3.95,-11 -3.55,-10.6 ; R56.2@-3.735,-8.644 ccw(c-3.923,-8.318) v1@-3.549,-8.277 ; R56.2@-3.735,-8.644 ccw(c-3.923,-8.318) v1@-3.549,-8.277 ; R56.2@-3.735,-8.644 ccw(c-3.923,-8.318) v1@-3.549,-8.277 ; -3.55,-10.6 cw(c-3.298,-10.6) -3.43,-10.385 ccw(c-3.298,-10.6) -3.55,-10.6 ; -3.55,-10.6 ccw(c-3.802,-10.6) -3.67,-10.385 cw(c-3.802,-10.6) -3.55,-10.6 ; -3.55,-9.455 cw(c-4.106,-9.455) -3.713,-9.848 ccw(c-4.106,-9.455) -3.55,-9.455 ; -3.55,-9.455 ccw(c-2.994,-9.455) -3.387,-9.848 cw(c-2.994,-9.455) -3.55,-9.455 ; v1@-3.55,-8.25 cw(c-4.274,-8.25) -3.762,-8.762 ccw(c-4.274,-8.25) v1@-3.55,-8.25 ; R56.2@-3.531,-8.85 cw(c-2.761,-8.85) -3.305,-8.305 ccw(c-2.761,-8.85) R56.2@-3.531,-8.85 ; v1@-3.507,-8.39 cw(c-3.701,-8.522) R56.2@-3.498,-8.639 ; v1@-3.507,-8.39 cw(c-3.701,-8.522) R56.2@-3.498,-8.639 ; v1@-3.507,-8.39 cw(c-3.701,-8.522) R56.2@-3.498,-8.639 ; R56.2@-3.498,-8.639 cw(c-3.254,-8.78) v1@-3.278,-8.499 ; R56.2@-3.498,-8.639 cw(c-3.254,-8.78) v1@-3.278,-8.499 ; R56.2@-3.498,-8.639 cw(c-3.254,-8.78) v1@-3.278,-8.499 ; U2.1@-6.324,-11.095 cw(c-6.095,-11.324) -6.095,-11 ccw(c-6.095,-11.324) U2.1@-6.324,-11.095 ; U2.1@-6.324,-10.883 ccw(c-6.041,-10.6) -6.041,-11 cw(c-6.041,-10.6) U2.1@-6.324,-10.883 ; R56.2@-3.924,-9.013 cw(c-4.826,-9.915) -3.55,-9.915 ccw(c-4.826,-9.915) R56.2@-3.924,-9.013 ; R56.2@-3.782,-8.871 cw(c-4.344,-9.433) -3.55,-9.433 ccw(c-4.344,-9.433) R56.2@-3.782,-8.871 ; R56.2@-3.761,-8.62 ccw(c-3.761,-8.279) -3.52,-8.52 cw(c-3.761,-8.279) R56.2@-3.761,-8.62 ; -3.717,-10.767 ccw(c-4.116,-10.369) -3.579,-10.198 cw(c-4.116,-10.369) -3.717,-10.767 ; R56.2@-3.641,-8.641 cw(c-3.3,-8.983) -3.3,-8.5 ccw(c-3.3,-8.983) R56.2@-3.641,-8.641 ; -3.485,-10.535 ccw(c-3.763,-10.257) -3.388,-10.137 cw(c-3.763,-10.257) -3.485,-10.535
"FB WATER": P7.11 R48.2 | length 13.1
  TOP w0.2: P7.11@3.6,-3.25 P7.11@3.6,-3.7 ; P7.11@3.611,-3.4 ccw(c3.594,-3.167) v1@3.82,-3.227 ; P7.11@3.626,-3.599 ccw(c3.616,-3.464) P7.11@3.747,-3.499 ; P7.11@3.665,-3.641 cw(c3.877,-3.764) v1@3.963,-3.534 ; P7.11@3.7,-3.581 cw(c3.845,-3.665) v1@3.928,-3.518 ; v1@3.95,-3.35 P7.11@3.6,-3.7 ; P7.11@3.6,-3.7 cw(c3.972,-4.072) 4.025,-3.549 ccw(c3.972,-4.072) P7.11@3.6,-3.7 ; P7.11@3.659,-3.641 ccw(c3.317,-3.3) 3.8,-3.3 cw(c3.317,-3.3) P7.11@3.659,-3.641
  BOTTOM w0.2: R48.2@-0.4,-3.45 0.1,-3.45 ; 3.849,-2 3.849,-3.099 v1@4.1,-3.35 ; 3.85,-2 3.85,-1.75 3.5,-1.4 0.6,-1.4 0.319,-1.681 0.319,-3.231 0.1,-3.45 ; 0.1,-3.45 cw(c0.1,-2.998) -0.239,-3.297 ccw(c0.1,-2.998) 0.1,-3.45 ; 0.1,-3.45 ccw(c0.1,-3.902) -0.239,-3.603 cw(c0.1,-3.902) 0.1,-3.45
  other v1: 4.05,-3.3
INT: P7.10 U10.1 | length 7.9
  TOP w0.2: v1(-4.15,-0.15) -3.8,-0.15 -3.6,0.05 P7.10@-3.6,0.75
  BOTTOM w0.2: U10.1@-9.9,-1 -9.75,-1.15 -4.5,-1.15 -4.15,-0.8 v1(-4.15,-0.15)
MOTO+: F1.2 QL5.D R36.2 T7.1
N454760: C46.2 NTC.1 U10.9 | length 28.1
  TOP w0.2: v1(-1.5,9.95) -0.6,10.85 NTC.1@-0.6,11.4 ; v1@-1.5,10.2 ccw(c-1.5,10.804) -1.073,10.377 ccw(c-0.646,9.95) v1@-1.25,9.95 ; v1@-1.435,10.191 ccw(c-1.322,10.615) -1.102,10.235 ; v1@-1.368,10.082 cw(c-0.6,9.314) NTC.1@-0.6,10.4 ; v1@-1.259,9.885 cw(c-0.516,9.686) NTC.1@-0.901,10.352 ; -1.027,10.423 cw(c-0.6,9.996) NTC.1@-0.6,10.6
  BOTTOM w0.2: U10.9@-11.1,3 -11.1,4.3 -10.6,4.8 -8.085,4.8 ; -8.072,6.03 cw(c-8.211,5.513) C46.2@-7.704,5.683 ; C46.2@-7.675,5.5 -7.675,5.21 -8.085,4.8 ; C46.2@-7.675,5.604 -8.35,6.279 -8.35,7.25 -8.1,7.5 -4.35,7.5 -3.5,8.35 ; -3.45,8.4 -3.5,8.35 ; -2.61,9.24 cw(c-1.5,8.131) v1@-1.5,9.7 ; -2.268,9.582 cw(c-1.5,8.814) v1@-1.5,9.9 ; -1.927,9.923 cw(c-1.5,9.496) v1@-1.5,10.1 ; v1@-1.725,9.84 ccw(c-1.9,9.755) -1.9,9.95 ; v1@-1.725,10.06 cw(c-1.9,10.145) -1.9,9.95 ; v1(-1.5,9.95) -1.9,9.95 ; -8.085,4.8 ccw(c-8.581,5.296) -7.899,5.461 cw(c-8.581,5.296) -8.085,4.8 ; -3.5,8.35 -1.9,9.95 ; -8.22,6.149 ccw(c-7.675,6.693) -7.675,5.923 cw(c-7.675,6.693) -8.22,6.149 ; C46.2@-8.005,5.934 cw(c-8.246,5.693) -7.905,5.693 ccw(c-8.246,5.693) C46.2@-8.005,5.934 ; -7.833,5.052 ccw(c-8.175,5.394) -7.704,5.508 cw(c-8.175,5.394) -7.833,5.052
N455535: C42.1 R55.2 R57.1 U10.4 | length 19.4
  BOTTOM w0.2: U10.4@-11.1,-1 -11.1,-3.4 -10.8,-3.7 ; C42.1@-10.3,-3.6 C42.1@-10.3,-3.7 ; R57.1@-10.271,-4.721 cw(c-9.764,-4.891) -9.903,-4.374 ; R55.2@-3.2,-3.6 -9.1,-3.6 R57.1@-10.3,-4.8 C42.1@-10.3,-3.7 ; -10.8,-3.7 cw(c-10.8,-4.15) -10.469,-3.845 ccw(c-10.8,-4.15) -10.8,-3.7 ; -10.8,-3.7 ccw(c-10.8,-3.292) -10.48,-3.546 cw(c-10.8,-3.292) -10.8,-3.7 ; -10.8,-3.7 C42.1@-10.3,-3.7 ; -10.3,-4.245 cw(c-9.744,-4.245) -10.137,-3.852 ccw(c-9.744,-4.245) -10.3,-4.245 ; -10.3,-4.245 ccw(c-10.856,-4.245) -10.463,-3.852 cw(c-10.856,-4.245) -10.3,-4.245 ; -10.3,-4.155 cw(c-10.856,-4.155) -10.463,-4.548 ccw(c-10.856,-4.155) -10.3,-4.155 ; -10.3,-4.155 ccw(c-9.744,-4.155) -10.137,-4.548 cw(c-9.744,-4.155) -10.3,-4.155 ; R57.1@-10.3,-4.481 ccw(c-10.3,-3.711) -9.755,-4.255 cw(c-10.3,-3.711) R57.1@-10.3,-4.481 ; R57.1@-10.07,-4.711 cw(c-9.729,-4.711) -9.97,-4.47 ccw(c-9.729,-4.711) R57.1@-10.07,-4.711
N475322: QL4.G R30.1 | length 5
  BOTTOM w0.2: QL4.G@10.504,0.753 cw(c10.334,0.583) 10.575,0.583 cw(c10.816,0.583) QL4.G@10.646,0.753 ; QL4.G@10.575,0.974 10.575,-2.525 ; 10.635,-2.585 ccw(c10.961,-2.258) R30.1@10.961,-2.72 ; R30.1@10.731,-2.936 ccw(c10.195,-2.905) 10.575,-2.525 ; R30.1@10.8,-2.75 10.575,-2.525
N478432: C40.2 R46.2 T2.1 U1.3 | length 2.1
  BOTTOM w0.2: -5.2,0.65 -4.9,0.95 R46.2@-3.2,0.95
  other v1: -6.45,-0.15
N479471: Q6.1 Q7.3 R27.2 R35.2 | length 21.4
  BOTTOM w0.2: Q7.3@4.248,8.944 4.248,9.448 ; R27.2@12.077,9.96 11.963,9.846 R35.2@6.065,9.846 4.646,9.846 4.248,9.448 ; 4.248,9.448 cw(c3.975,9.448) 4.105,9.208 ccw(c3.975,9.448) 4.248,9.448 ; 4.248,9.448 ccw(c4.521,9.448) 4.391,9.208 cw(c4.521,9.448) 4.248,9.448 ; 5.025,9.846 cw(c5.025,8.983) 5.635,9.593 ccw(c5.025,8.983) 5.025,9.846 ; 5.025,9.846 ccw(c5.025,10.708) 5.635,10.098 cw(c5.025,10.708) 5.025,9.846 ; 7.106,9.846 cw(c7.106,10.708) 6.496,10.098 ccw(c7.106,10.708) 7.106,9.846 ; 7.106,9.846 ccw(c7.106,8.983) 6.496,9.593 cw(c7.106,8.983) 7.106,9.846 ; 9.301,9.846 ccw(c9.301,10.735) 9.93,10.106 cw(c9.301,10.735) 9.301,9.846 ; 9.534,9.846 cw(c9.534,9.286) 9.93,9.682 ccw(c9.534,9.286) 9.534,9.846 ; Q6.1@10.554,9.682 cw(c10.95,9.286) 10.95,9.846 ccw(c10.95,9.286) Q6.1@10.554,9.682 ; Q6.1@10.554,10.106 ccw(c11.183,10.735) 11.183,9.846 cw(c11.183,10.735) Q6.1@10.554,10.106 ; 11.46,9.846 ccw(c11.46,10.488) 11.914,10.034 cw(c11.46,10.488) 11.46,9.846 ; 11.582,9.846 cw(c11.582,9.376) 11.914,9.708 ccw(c11.582,9.376) 11.582,9.846
N479603: D7.2 R35.1 | length 30.6
  BOTTOM w0.2: R35.1@6.065,8.068 6.59,7.543 ; 6.134,7.592 cw(c6.46,7.801) R35.1@6.216,8.101 ; R35.1@6.151,7.723 cw(c6.062,7.391) 6.36,7.563 ; 6.255,7.404 cw(c6.601,7.626) R35.1@6.342,7.946 ; 6.343,7.591 cw(c6.642,7.763) R35.1@6.368,7.972 ; 6.376,7.216 cw(c6.742,7.451) R35.1@6.468,7.79 ; 6.493,7.331 cw(c6.9,7.566) R35.1@6.527,7.851 ; D7.2@6.59,5.896 6.59,7.543 ; D7.2@6.196,6.388 ccw(c5.697,6.944) 6.427,7.105 ; D7.2@6.196,6.388 ccw(c5.697,6.944) 6.427,7.105 ; D7.2@6.196,6.388 ccw(c5.697,6.944) 6.427,7.105 ; D7.2@6.33,6.239 ccw(c5.96,6.651) 6.501,6.771 ; D7.2@6.33,6.239 ccw(c5.96,6.651) 6.501,6.771 ; D7.2@6.33,6.239 ccw(c5.96,6.651) 6.501,6.771 ; 6.427,7.105 ccw(c7.308,7.301) D7.2@6.914,6.489 ; 6.427,7.105 ccw(c7.308,7.301) D7.2@6.914,6.489 ; 6.427,7.105 ccw(c7.308,7.301) D7.2@6.914,6.489 ; 6.516,6.702 ccw(c7.078,6.826) D7.2@6.827,6.309 ; 6.516,6.702 ccw(c7.078,6.826) D7.2@6.827,6.309 ; 6.516,6.702 ccw(c7.078,6.826) D7.2@6.827,6.309 ; 6.59,7.543 ccw(c8.231,7.543) 7.085,6.369 cw(c8.231,7.543) 6.59,7.543 ; 6.59,7.543 cw(c6.787,7.739) 6.549,7.883 ccw(c6.787,7.739) 6.59,7.543 ; R35.1@5.991,7.815 cw(c4.542,6.367) 6.59,6.367 ccw(c4.542,6.367) R35.1@5.991,7.815 ; R35.1@6.132,7.957 cw(c5.025,6.85) 6.59,6.85 ccw(c5.025,6.85) R35.1@6.132,7.957 ; D7.2@6.171,6.364 ccw(c5.158,7.377) 6.59,7.377 cw(c5.158,7.377) D7.2@6.171,6.364 ; R35.1@6.243,7.711 cw(c6.243,7.277) 6.549,7.584 ccw(c6.243,7.277) R35.1@6.243,7.711 ; R35.1@6.273,8.098 cw(c5.508,7.333) 6.59,7.333 ccw(c5.508,7.333) R35.1@6.273,8.098 ; D7.2@6.312,6.222 ccw(c5.641,6.894) 6.59,6.894 cw(c5.641,6.894) D7.2@6.312,6.222 ; 6.59,7.068 ccw(c7.767,7.068) 6.945,6.226 cw(c7.767,7.068) 6.59,7.068
N479627: D7.1 Q6.2 QL5.G R32.1 | length 44.6
  TOP w0.2: 9.205,4.659 9.241,4.659
  BOTTOM w0.2: Q6.2@9.939,7.773 cw(c9.576,7.376) 10.102,7.263 ; 10.16,7.532 cw(c10.486,7.462) Q6.2@10.305,7.742 ; Q6.2@10.242,7.994 10.242,6.118 D7.1@10.528,6.404 ; 10.948,6.404 ccw(c10.948,6.652) v1@11.123,6.477 ; 10.964,6.404 cw(c10.964,6.01) v1@11.262,6.267 ; v1@11.111,6.137 ccw(c10.528,5.634) D7.1@10.528,6.404 ; v1@11.338,6.267 cw(c11.638,6.006) 11.638,6.404 ; v1@11.373,6.215 cw(c11.558,5.525) R32.1@11.951,6.123 ; v1@11.477,6.123 cw(c11.7,5.9) 11.7,6.215 ; v1@11.477,6.477 ccw(c11.652,6.652) 11.652,6.404 ; v1@11.489,6.136 cw(c12.077,5.624) R32.1@12.077,6.404 ; v1@11.54,6.369 ccw(c11.743,6.427) 11.743,6.215 ; 11.718,6.308 ccw(c11.65,6.561) R32.1@11.878,6.43 ; 10.242,7.27 cw(c10.966,7.27) 10.454,7.782 ccw(c10.966,7.27) 10.242,7.27 ; 10.242,7.27 ccw(c9.518,7.27) 10.03,7.782 cw(c9.518,7.27) 10.242,7.27 ; D7.1@10.528,6.404 R32.1@12.077,6.404 ; v1@11.521,6.404 cw(c11.521,5.848) 11.914,6.241 ccw(c11.521,5.848) v1@11.521,6.404 ; v1@11.521,6.404 ccw(c11.521,6.96) 11.914,6.567 cw(c11.521,6.96) v1@11.521,6.404 ; R32.1@12.077,6.404 ccw(c12.077,4.709) 10.619,5.573 cw(c12.077,4.709) R32.1@12.077,6.404 ; D7.1@9.6,6.364 ccw(c8.05,7.914) 10.242,7.914 cw(c8.05,7.914) D7.1@9.6,6.364 ; D7.1@9.741,6.222 ccw(c8.533,7.431) 10.242,7.431 cw(c8.533,7.431) D7.1@9.741,6.222 ; D7.1@9.883,6.081 ccw(c9.015,6.948) 10.242,6.948 cw(c9.015,6.948) D7.1@9.883,6.081 ; D7.1@9.93,5.98 cw(c10.674,5.54) 10.674,6.404 ccw(c10.674,5.54) D7.1@9.93,5.98 ; D7.1@10.103,5.879 cw(c11.024,5.333) 11.024,6.404 ccw(c11.024,5.333) D7.1@10.103,5.879 ; 10.242,7.033 ccw(c11.188,7.033) 10.519,6.364 cw(c11.188,7.033) 10.242,7.033 ; D7.1@10.275,5.777 cw(c11.375,5.125) 11.375,6.404 ccw(c11.375,5.125) D7.1@10.275,5.777 ; D7.1@10.447,5.675 cw(c11.726,4.917) 11.726,6.404 ccw(c11.726,4.917) D7.1@10.447,5.675 ; D7.1@10.716,5.92 cw(c11.15,5.327) 11.262,6.053 ccw(c11.15,5.327) D7.1@10.716,5.92 ; D7.1@10.776,6.337 cw(c10.842,6.093) 11.072,6.197 ccw(c10.842,6.093) D7.1@10.776,6.337 ; D7.1@10.807,5.753 ccw(c10.262,6.323) 11.05,6.305 cw(c10.262,6.323) D7.1@10.807,5.753 ; 10.865,6.029 ccw(c10.586,6.41) 11.053,6.338 cw(c10.586,6.41) 10.865,6.029 ; 10.871,6.269 cw(c10.919,6.09) 11.081,6.18 ccw(c10.919,6.09) 10.871,6.269 ; 10.885,6.273 ccw(c10.8,6.589) 11.083,6.425 cw(c10.8,6.589) 10.885,6.273 ; 10.996,5.934 cw(c11.285,5.632) 11.295,6.05 ccw(c11.285,5.632) 10.996,5.934 ; v1@11.425,6.517 ccw(c11.653,6.911) 11.771,6.471 cw(c11.653,6.911) v1@11.425,6.517 ; v1@11.448,6.501 ccw(c11.727,6.879) 11.798,6.415 cw(c11.727,6.879) v1@11.448,6.501 ; v1@11.472,6.481 ccw(c11.801,6.827) 11.917,6.364 cw(c11.801,6.827) v1@11.472,6.481 ; v1@11.514,6.171 cw(c11.774,6.016) 11.701,6.31 ccw(c11.774,6.016) v1@11.514,6.171 ; v1@11.53,6.202 cw(c12.005,5.999) 11.871,6.498 ccw(c12.005,5.999) v1@11.53,6.202
  other v1: 11.3,5.4 11.3,6.3
N479651: Q6.3 R26.2 | length 9.6
  BOTTOM w0.2: Q6.3@7.917,8.944 11.26,8.944 ; R26.2@11.975,8.228 11.26,8.944 ; 8.741,8.944 cw(c8.741,9.668) 8.229,9.156 ccw(c8.741,9.668) 8.741,8.944 ; 8.741,8.944 ccw(c8.741,8.22) 8.229,8.732 cw(c8.741,8.22) 8.741,8.944 ; 11.26,8.944 ccw(c11.753,9.437) 11.9,8.755 cw(c11.753,9.437) 11.26,8.944 ; 11.491,8.712 cw(c11.185,8.406) 11.618,8.406 ccw(c11.185,8.406) 11.491,8.712 ; R26.2@11.519,8.684 ccw(c11.845,9.01) 11.942,8.56 cw(c11.845,9.01) R26.2@11.519,8.684
N1340945: C39.2 Q8.2 QL1.D R43.2 R62.2 | length 80.1
  BOTTOM w0.2: R43.2@0.435,2.712 cw(c0.295,2.469) 0.565,2.542 ; R43.2@0.44,2.709 cw(c0.128,2.136) 0.758,2.305 ; Q8.2@0.538,2.087 ccw(c0.297,2.328) 0.638,2.328 ; C39.2@0.55,4.2 0.55,1.975 Q8.2@0.75,1.775 ; Q8.2@0.569,2.114 ccw(c0.478,2.236) 0.609,2.312 ccw(c0.866,2.46) Q8.2@0.808,2.169 ; Q8.2@0.58,2.122 ccw(c0.387,2.403) 0.682,2.573 ; Q8.2@0.638,2.272 cw(c1.201,2.423) R43.2@0.734,2.773 ; 0.638,2.574 ccw(c1.137,2.574) Q8.2@0.895,2.138 ; Q8.2@0.693,1.957 ccw(c0.51,2.224) 0.79,2.385 ; 0.709,2.489 cw(c1.1,2.594) R43.2@0.749,2.796 ; Q8.2@0.9,1.575 2.475,1.575 QL1.D@3.605,2.705 ; 2.699,1.799 cw(c3.895,0.602) QL1.D@4.465,2.196 ; 2.709,1.809 cw(c3.788,0.73) QL1.D@4.242,2.187 ; 2.922,2.022 cw(c4.013,0.931) QL1.D@4.532,2.384 ; 2.943,2.043 cw(c3.899,1.087) QL1.D@4.301,2.377 ; 3.145,2.245 cw(c4.13,1.26) QL1.D@4.599,2.572 ; 3.177,2.277 cw(c4.01,1.444) QL1.D@4.361,2.568 ; 3.369,2.469 cw(c4.248,1.59) QL1.D@4.666,2.761 ; 3.405,2.505 ccw(c3.056,2.855) QL1.D@3.55,2.855 ; 3.411,2.511 cw(c4.121,1.8) QL1.D@4.42,2.759 ; QL1.D@3.541,2.077 ccw(c3.679,3.763) QL1.D@4.774,2.474 ; QL1.D@3.592,2.692 cw(c4.366,1.919) QL1.D@4.734,2.949 ; QL1.D@3.801,2.893 cw(c3.605,2.901) QL1.D@3.605,2.705 ; QL1.D@3.861,2.529 ccw(c3.605,2.43) QL1.D@3.605,2.705 ; QL1.D@4.182,1.996 ccw(c3.676,0.374) 2.475,1.575 cw(c3.778,0.273) QL1.D@4.397,2.007 ; QL1.D@4.312,3.789 ccw(c4.389,4.12) 4.697,3.977 ; R62.2@4.35,5.95 4.95,5.35 ; QL1.D@4.357,3.984 ccw(c4.445,4.364) 4.8,4.201 ; QL1.D@4.361,3.899 cw(c4.194,3.697) QL1.D@4.396,3.531 ; QL1.D@4.364,3.491 ccw(c2.948,4.907) 4.95,4.907 ; QL1.D@4.399,3.879 cw(c4.231,3.251) QL1.D@4.794,3.576 ; QL1.D@4.399,4.373 ccw(c4.231,5.001) 4.794,4.676 ; QL1.D@4.402,4.179 ccw(c4.502,4.609) QL1.D@4.903,4.424 ; QL1.D@4.414,3.491 ccw(c3.119,4.786) 4.95,4.786 ccw(c6.981,4.786) QL1.D@5.545,3.35 ; QL1.D@4.489,4.053 cw(c4.322,3.852) QL1.D@4.524,3.687 ; QL1.D@4.505,3.35 ccw(c3.431,4.424) QL1.D@4.95,4.424 ; QL1.D@4.555,3.35 ccw(c3.601,4.303) 4.95,4.303 ccw(c6.499,4.303) QL1.D@5.404,3.208 ; QL1.D@4.604,3.905 cw(c3.77,3.071) QL1.D@4.95,3.071 ; QL1.D@4.604,4.347 ccw(c3.77,5.181) 4.95,5.181 ; QL1.D@4.614,3.787 cw(c5.057,3.594) QL1.D@5.08,4.076 ; QL1.D@4.617,4.207 cw(c4.451,4.007) QL1.D@4.652,3.842 ; QL1.D@4.646,3.208 ccw(c3.914,3.941) QL1.D@4.95,3.941 ; 4.692,4.126 cw(c4.89,3.993) QL1.D@5.02,4.192 ; 4.692,4.126 ccw(c4.89,4.259) QL1.D@5.02,4.06 ; 4.73,4.052 cw(c5.071,3.903) QL1.D@5.089,4.276 ; 4.746,4.047 cw(c4.253,3.554) QL1.D@4.95,3.554 ; 4.746,4.205 ccw(c4.253,4.698) 4.95,4.698 ; QL1.D@4.763,3.725 cw(c5.294,3.583) QL1.D@5.026,4.063 ; 4.805,3.958 ccw(c5.001,4.09) QL1.D@5.13,3.892 ; 4.805,4.294 cw(c5.001,4.162) QL1.D@5.13,4.36 ; QL1.D@4.835,3.511 cw(c5.436,3.35) QL1.D@5.125,3.889 ; 4.845,4.318 cw(c5.086,4.213) QL1.D@5.099,4.475 ; QL1.D@4.885,4.182 cw(c4.973,4.158) QL1.D@4.929,4.238 ; QL1.D@4.95,3.433 cw(c5.618,3.433) QL1.D@5.146,3.905 ; QL1.D@4.95,4.183 ccw(c6.328,4.183) QL1.D@5.354,3.208 ; 4.95,4.665 ccw(c6.811,4.665) QL1.D@5.495,3.35 ; 4.95,4.819 ccw(c5.618,4.819) QL1.D@5.146,4.347 ; 4.95,5.148 ccw(c7.293,5.148) QL1.D@5.636,3.491 ; 4.95,5.269 ccw(c7.464,5.269) QL1.D@5.686,3.491 ; 4.951,4.661 ccw(c5.41,4.73) QL1.D@5.134,4.356 ; QL1.D@4.99,4.329 ccw(c4.628,4.558) 5.046,4.652 ; QL1.D@5.051,3.879 cw(c4.963,3.525) QL1.D@5.276,3.713 ; QL1.D@5.056,3.878 cw(c4.891,3.001) QL1.D@5.628,3.504 ; QL1.D@5.094,4.074 cw(c5.018,3.672) 5.356,3.903 ; QL1.D@5.104,3.606 cw(c5.473,3.705) QL1.D@5.158,3.92 ; 0.55,2.355 cw(c1.106,2.355) 0.713,2.748 ccw(c1.106,2.355) 0.55,2.355 ; 0.55,2.355 ccw(c-0.006,2.355) 0.387,2.748 cw(c-0.006,2.355) 0.55,2.355 ; 0.55,3.555 cw(c1.106,3.555) 0.713,3.948 ccw(c1.106,3.555) 0.55,3.555 ; 0.55,3.555 ccw(c-0.006,3.555) 0.387,3.948 cw(c-0.006,3.555) 0.55,3.555 ; 0.55,3.645 cw(c-0.006,3.645) 0.387,3.252 ccw(c-0.006,3.645) 0.55,3.645 ; 0.55,3.645 ccw(c1.106,3.645) 0.713,3.252 cw(c1.106,3.645) 0.55,3.645 ; 1.233,1.575 cw(c1.233,2.158) 0.821,1.746 ccw(c1.233,2.158) 1.233,1.575 ; 1.233,1.575 ccw(c1.233,1.192) 0.962,1.463 cw(c1.233,1.192) 1.233,1.575 ; QL1.D@3.605,2.705 4.95,2.705 4.95,5.35 ; 4.95,5.35 ccw(c4.561,4.961) 4.206,5.381 cw(c4.561,4.961) 4.95,5.35 ; R43.2@0.55,2.599 ccw(c1.474,2.599) 0.821,1.946 cw(c1.474,2.599) R43.2@0.55,2.599 ; R43.2@0.55,3.082 ccw(c1.957,3.082) 0.962,2.087 cw(c1.957,3.082) R43.2@0.55,3.082 ; Q8.2@0.962,1.887 ccw(c1.716,2.641) 1.716,1.575 cw(c1.716,2.641) Q8.2@0.962,1.887 ; R62.2@3.947,5.686 cw(c4.279,5.294) 4.643,5.657 ccw(c4.279,5.294) R62.2@3.947,5.686 ; R62.2@4.076,5.533 cw(c4.42,5.127) 4.796,5.504 ccw(c4.42,5.127) R62.2@4.076,5.533
N1341041: Q9.3 QL1.G R44.2 | length 4.4
  BOTTOM w0.2: Q9.3@2.1,0 3.75,0 ; Q9.3@2.171,-0.171 cw(c2.583,-0.583) 2.583,0 cw(c2.583,0.383) Q9.3@2.312,0.112 ; Q9.3@2.312,-0.312 cw(c3.066,-1.066) 3.066,0 ; Q9.3@2.312,-0.212 cw(c2.824,-0.724) 2.824,0 cw(c2.824,0.724) Q9.3@2.312,0.212
N1341185: C39.1 Q8.1 R43.1 R45.2 | length 26.6
  BOTTOM w0.2: R45.2@-7.5,6.7 -7.1,6.7 -6.8,6.4 ; -1.514,4.644 cw(c-1.689,3.992) C39.1@-1.077,4.276 ; R43.1@-1.249,2.796 cw(c-1.684,2.545) -1.199,2.415 ; -1.219,2.341 cw(c-0.63,2.183) R43.1@-0.935,2.712 ; Q8.1@-1.15,1.775 -1.15,4.1 C39.1@-1.05,4.2 ; -1.099,3.503 ccw(c-0.947,3.463) R43.1@-0.989,3.311 ; -6.8,6.4 ccw(c-7.122,6.078) -7.314,6.491 cw(c-7.122,6.078) -6.8,6.4 ; -6.8,6.4 -6.8,5.1 -6.55,4.85 -1.8,4.85 C39.1@-1.15,4.2 ; Q8.1@-1.3,2.135 ccw(c-1.557,2.579) -1.061,2.446 ; Q8.1@-1.3,2.135 ccw(c-1.557,2.579) -1.061,2.446 ; Q8.1@-1.3,2.135 ccw(c-1.557,2.579) -1.061,2.446 ; R43.1@-1.15,2.599 cw(c-1.874,2.599) -1.362,2.087 ccw(c-1.874,2.599) R43.1@-1.15,2.599 ; R43.1@-1.15,2.599 ccw(c-0.426,2.599) -0.938,2.087 cw(c-0.426,2.599) R43.1@-1.15,2.599 ; C39.1@-1.15,4.2 C39.1@-1.05,4.2 ; C39.1@-1.15,4.2 C39.1@-1.05,4.2 ; -1.099,3.697 cw(c-0.947,3.737) C39.1@-0.989,3.889 ; -1.099,3.697 cw(c-0.947,3.737) C39.1@-0.989,3.889 ; -1.099,3.697 cw(c-0.947,3.737) C39.1@-0.989,3.889 ; -1.058,2.459 ccw(c-0.711,2.366) Q8.1@-0.95,2.099 ; -1.058,2.459 ccw(c-0.711,2.366) Q8.1@-0.95,2.099 ; -1.058,2.459 ccw(c-0.711,2.366) Q8.1@-0.95,2.099 ; R45.2@-7.398,6.673 cw(c-7.251,6.354) -7.002,6.602 ccw(c-7.251,6.354) R45.2@-7.398,6.673 ; -1.765,4.815 ccw(c-1.05,5.531) -1.05,4.519 cw(c-1.05,5.531) -1.765,4.815 ; -1.424,4.474 ccw(c-1.05,4.848) -1.05,4.319 cw(c-1.05,4.848) -1.424,4.474 ; Q8.1@-1.15,2.114 cw(c-0.253,2.114) -0.887,2.748 ccw(c-0.253,2.114) Q8.1@-1.15,2.114 ; R43.1@-1.15,3.314 cw(c-0.253,3.314) -0.887,3.948 ccw(c-0.253,3.314) R43.1@-1.15,3.314 ; C39.1@-1.15,3.886 ccw(c-0.253,3.886) -0.887,3.252 cw(c-0.253,3.886) C39.1@-1.15,3.886
N1341189: F3.1 R62.1 | length 21.1
  BOTTOM w0.2: F3.1@-4.9,6 F3.1@-3.2,6 ; F3.1@-3.2,6.05 F3.1@-3.2,6 ; F3.1@-3.2,6 -0.15,6 ; -0.778,6 cw(c-0.778,4.672) 0.161,5.611 ccw(c-0.778,4.672) -0.778,6 ; -0.778,6 ccw(c-0.778,7.328) 0.161,6.389 cw(c-0.778,7.328) -0.778,6 ; -0.295,6 cw(c-0.295,5.155) 0.303,5.753 ccw(c-0.295,5.155) -0.295,6 ; -0.295,6 ccw(c-0.295,6.845) 0.303,6.247 cw(c-0.295,6.845) -0.295,6 ; -0.15,6 cw(c-0.15,5.83) 0.016,5.87 ccw(c-0.15,5.83) -0.15,6 ; -0.15,6 ccw(c-0.15,6.17) 0.016,6.13 cw(c-0.15,6.17) -0.15,6 ; F3.1@-3.348,5.724 cw(c-2.681,5.057) -2.681,6 ccw(c-2.681,5.057) F3.1@-3.348,5.724 ; F3.1@-3.348,6.377 ccw(c-2.437,7.288) -2.437,6 cw(c-2.437,7.288) F3.1@-3.348,6.377 ; F3.1@-3.206,5.582 cw(c-2.198,4.574) -2.198,6 ccw(c-2.198,4.574) F3.1@-3.206,5.582 ; F3.1@-3.206,6.519 ccw(c-1.954,7.771) -1.954,6 cw(c-1.954,7.771) F3.1@-3.206,6.519